# Altium PCB sonar_DAQ_single.PcbDoc
Units mil, origin at the board's own origin, x right, y up, seen from the top; angles counter-clockwise.
Board outline 3250 x 1000 mil, 2 copper layers (Top Layer, Bottom Layer); 36 components, 25 nets, 101 pads, 18 vias.
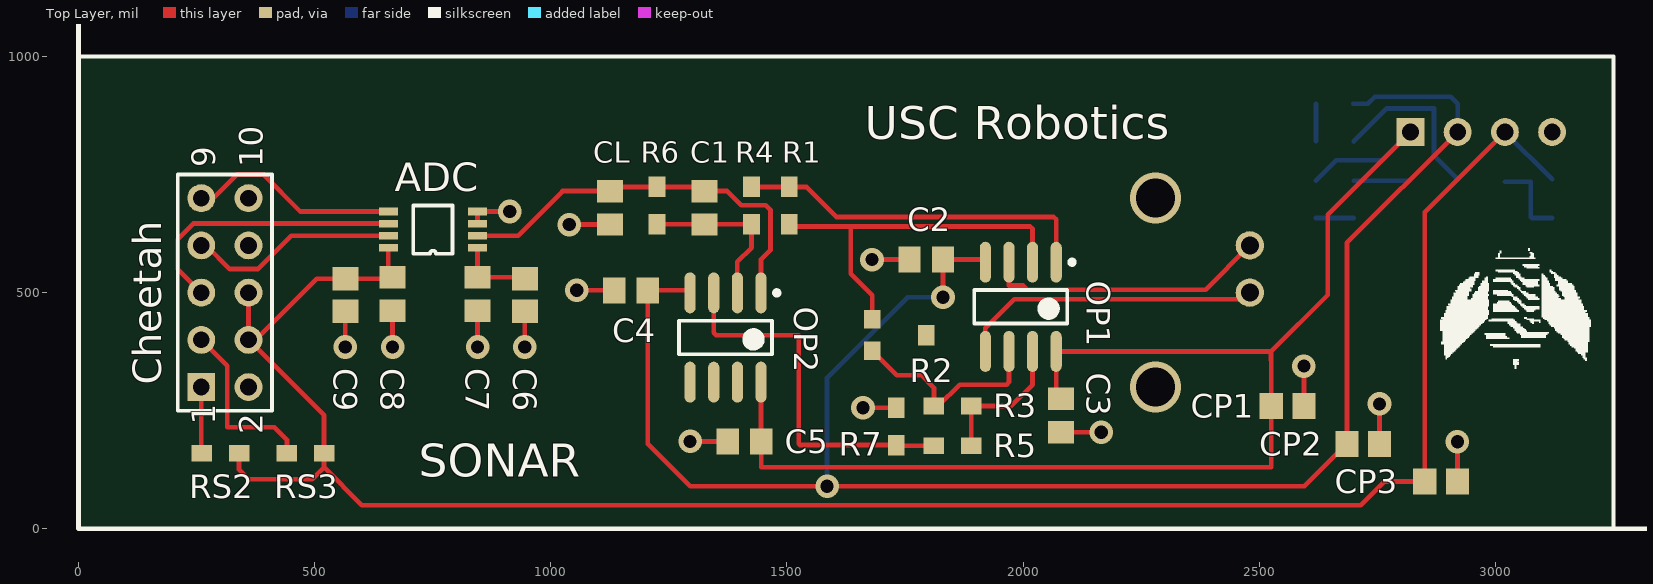
[diagram p0: Top Layer view]
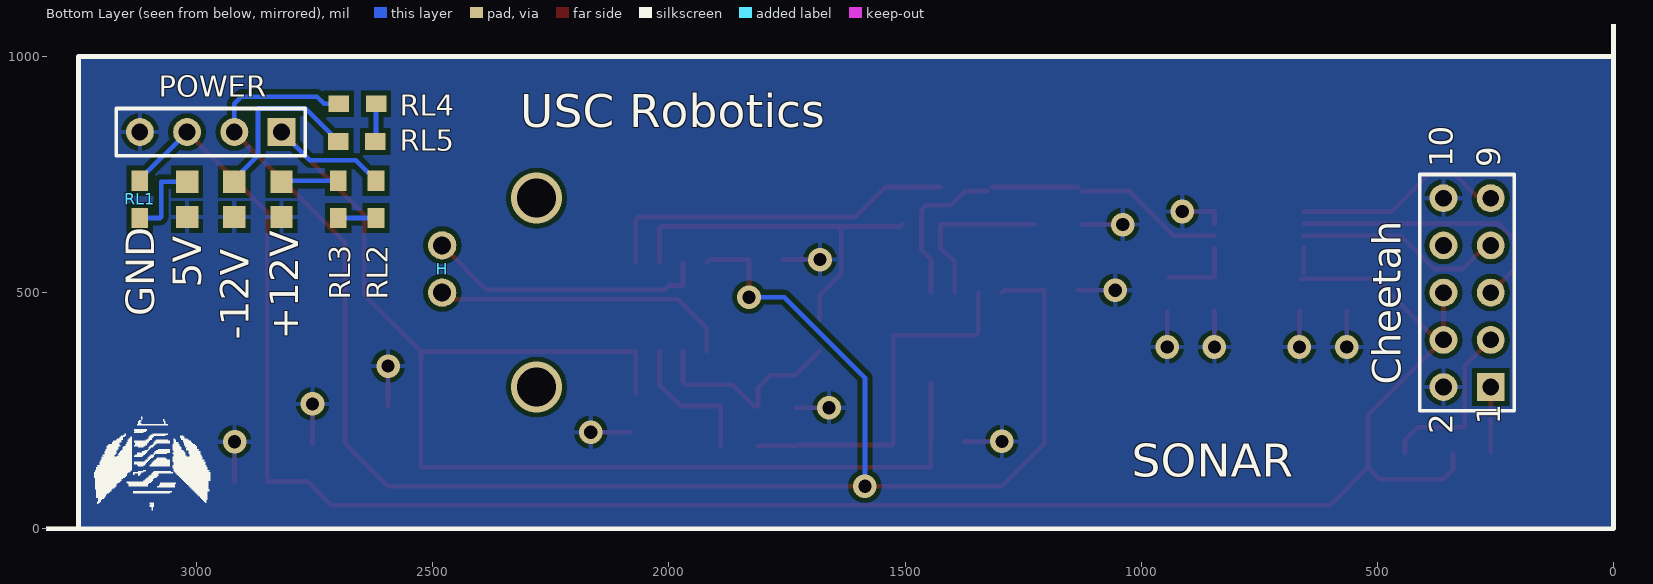
[diagram p1: Bottom Layer view, seen from below]

## Layer stack, top to bottom
Top Layer: signal copper 1.4
Dielectric: dielectric 12.6, FR-4, Dk 4.8
Bottom Layer: signal copper 1.4

## Board outline
0,0 0,1000 3250,1000 3250,0

## Design rules (kind name [scope] priority, off if disabled: settings)
Clearance [All] p1: gap=10
DiffPairsRouting [All] p1: maxlimit=10 minlimit=10 mostfreqgap=10 maxuncoupledlength=500
PolygonConnect [All] p1: connectstyle=Relief reliefconductorwidth=10 reliefentries=4 polygonreliefangle="90 Angle"
RoomDefinition sonar_DAQ_single [InComponentClass('sonar_DAQ_single')] p1: confinementstyle=ConfineIn formatcopy=TRUE lockcomponents=FALSE outline 0,0 6775,0 6775,8500 0,8500
RoutingVias [All] p1: holewidth=28 width=50 viastyle="Through Hole" minholewidth=28 minwidth=50 maxholewidth=28 maxwidth=50
SilkscreenOverComponentPads [All] p1: minsilkscreentomaskgap=10
SolderMaskExpansion [All] p1: expansion=4
TestPointUsage [All] p1: valid=0 allowmultiple=FALSE
Testpoint [All] p1: side=15 testpointundercomponent=TRUE minsize=40 maxsize=100 preferedsize=60 minholesize=0 maxholesize=40 preferedholesize=32 testpointgrid=1 style=1023 order=0123456789
Width [All] p1: maxlimit=10 minlimit=10 preferedwidth=10
22 further rules are at their usual default settings.

## Classes and differential pairs
differential pair H: +H_P -H_N

## Components (designator, comment, footprint, x,y, rotation, side; value= is the part's Value field where it differs from the comment)
5V "LED3" 0805_led 3020,734.8 r270 bottom
+12V "LED3" 0805_led 2820,734.8 r270 bottom
-12V "LED3" 0805_led 2920,660 r90 bottom
ADC "ADC" ADC 845,595 r180 top
C1 "Cap" 0805_ceramic_cap 1325,679.51 r270 top
C2 "Cap" 0805_ceramic_cap 1795,570 r0 top
C3 "Cap" 0805_ceramic_cap 2080,240 r90 top
C4 "Cap" 0805_ceramic_cap 1170,505 r0 top
C5 "Cap" 0805_ceramic_cap 1410,185 r0 top
C6 "2.2u" 0805_tantalum_cap 945,495 r270 top
C7 ".1u" 0805_ceramic_cap 845,496.97 r270 top
C8 ".1u" 0805_ceramic_cap 665,496.97 r270 top
C9 "10u" 0805_tantalum_cap 565,495 r270 top
Cheetah "Header 5X2" HDR2X5 260,300 r90 bottom
CL "Cap" 0805_ceramic_cap 1125,679.51 r270 top
CP1 "10u" 0805_tantalum_cap 2560,260 r0 top
CP2 "10u" 0805_tantalum_cap 2720,180 r0 top
CP3 "10u" 0805_tantalum_cap 2885,100 r0 top
H "BNC" BNC 2480,500 r90 bottom
OP1 "LT1113 Dual Opamp" lt1113_opamp 1995,470 r270 top
OP2 "LT1113 Dual Opamp" lt1113_opamp 1370,405 r270 top
POWER "Header 4" HDR1X4 2820,840 r0 bottom
R1 "Res1" 0805_res 1505,645 r90 top
R2 "RPot" trimmer_pot 1795,410 r270 top
R3 "Res1" 0805_res 1811.26,260 r0 top
R4 "Res1" 0805_res 1425,645 r90 top
R5 "Res1" 0805_res 1811.26,176.06 r0 top
R6 "Res1" 0805_res 1225,723.74 r270 top
R7 "Res1" 0805_res 1731.26,256.06 r270 top
RL1 "Res3" 0805_res 3120,658.03 r90 bottom
RL2 "Res3" 0805_res 2620,658.03 r90 bottom
RL3 "Res3" 0805_res 2700,736.77 r270 bottom
RL4 "Res3" 0805_res 2620,900 r0 bottom
RL5 "Res3" 0805_res 2700,820 r180 bottom
RS2 "Res1" 0805_res 340,160 r180 top
RS3 "Res1" 0805_res 520,160 r180 top

## Footprints (in the part's own frame and the unit in brackets; to place one, negate y for a bottom-side part, rotate by r counter-clockwise, add the part's x,y. Pads: shape width x height; smd on the part's side, far side on the other; paste and mask are expansions set on the pad)
0805_ceramic_cap [mm] "Murata"
  rect 1.2x1.4 smd: 1(-0.9,0) 2(0.9,0)
  body extent -1.05,-0.67 1.05,0.67, height 1.26
0805_led [mm]
  rect 1.2x1.2 smd: 1(0,0) 2(1.9,0)
0805_res [mm]
  rect 1.1x0.9 smd: 1(0,0) 2(2,0)
0805_tantalum_cap [mm] "F92 Nichicon"
  rect 1.25x1.4 smd: 1(-0.875,0) 2(0.875,0)
  body extent -1.1,-0.67 1.1,0.67, height 1.2
ADC [mm]
  rect 1.02x0.41 smd: 1(0,0) 2(0,-0.65) 3(0,-1.3) 4(0,-1.95) 5(4.8,-1.95) 6(4.8,-1.3) 7(4.8,-0.65) 8(4.8,0)
  silkscreen extent 1.34,-2.28 3.46,0.33
BNC [mil]
  round 60 hole 38.19: 1(0,0) 2(100,0)
HDR1X4 [mm] "Connector; Header; 4 Position"
  rect 1.5x1.5 hole 0.9: 1(0,0)
  round 1.5 hole 0.9: 2(2.54,0) 3(5.08,0) 4(7.62,0)
  silkscreen extent -1.27,-1.27 8.89,1.27
HDR2X5 [mm] "Connector; Header; 5x2 Position"
  rect 1.5x1.5 hole 0.9: 1(0,0)
  round 1.5 hole 0.9: 2(0,2.54) 3(2.54,0) 4(2.54,2.54) 5(5.08,0) 6(5.08,2.54) 7(7.62,0) 8(7.62,2.54) 9(10.16,0) 10(10.16,2.54)
  silkscreen extent -1.27,-1.27 11.43,3.81
lt1113_opamp [mm] "SOIC, 8-Leads, Body 5.0x4.0mm (max), Pitch 1.27mm, IPC Medium Density"
  oval 2.2x0.6 smd: 1(-2.4,1.905) 2(-2.4,0.635) 3(-2.4,-0.635) 4(-2.4,-1.905) 5(2.4,-1.905) 6(2.4,-0.635) 7(2.4,0.635) 8(2.4,1.905)
  silkscreen extent -2.52,-2.5 0.9,2.88, body extent -1.99,-2.52 1.99,2.52, height 1.75
trimmer_pot [mm]
  rect 1x0.9 smd: 1(-0.85,-2.9) 2(0.85,-2.9)
  rect 1.1x0.9 smd: 3(0,0)

## Part data
5V +12V -12V: "Typical BLUE SiC LED"
ADC: "ADS7835"
C1 C2 C3 C4 C5 CL: "Capacitor"
C6 C7 C8 C9 CP1 CP2 CP3: library part Cap, "Capacitor"
Cheetah: "Header, 5-Pin, Dual row"
H: "BNC Elbow Connector"
OP1 OP2: library part "LT1113 OPAMP"
POWER: "Header, 4-Pin"
R1 R3 R4 R5 R6 R7 RL1 RL2 RL3 RL4 RL5 RS2 RS3: "Resistor"
R2: "Potentiometer"

## Via types
v1: diameter 50, hole 28, Top Layer to Bottom Layer, 16 vias
v2: diameter 107.87, hole 82.28, Top Layer to Bottom Layer, 2 vias

## Nets (pads, with @x,y where several pads share a name; then routed paths per layer and width w, separated by ;. In a path a pad name is that pad's centre, name@x,y a point inside that pad or via, vN(x,y) a via of type N, cw(c..) or ccw(c..) an arc to the next point about the centre after c; other vN are vias at no path point)
5V: ADC.8 C8.1 C9.1 Cheetah.4 Cheetah.6 CP3.1 POWER.3 RL1.2 RS2.1 RS3.1 | length 4415.2
  Top Layer w10: RS2.1 340,125 360,105 495,105 520,130 ; Cheetah.6 Cheetah.4 ; C8.1@656.02,541.38 ADC.8 ; C8.1@662.05,529.45 C9.1 504.45,529.45 375,400 Cheetah.4 ; POWER.3 2850.55,670.55 CP3.1 2765,100 2715,50 600,50 520,130 ; Cheetah.4 520,240 RS3.1 520,130
  Bottom Layer w10: POWER.3 RL1.2@3120,740
+12V: C3.2 C5.2 CP1.1 OP1.8 OP2.8 POWER.1 RL2.2 | length 2897
  Top Layer w10: C5.2@1445,185.43 OP2.8 ; C5.2@1445.55,184.88 1445.55,130.55 2525.55,130.55 CP1.1 2525.55,375.55 2645,495 2645,665 POWER.1 ; C3.2@2070,285.43 OP1.8 2524.49,375.51 2524.49,356.61
  Bottom Layer w10: RL2.2 2663.23,780 2760,780 POWER.1
-12V: C2.2 C4.2 CP2.1 OP1.4 OP2.4 POWER.2 RL4.2 | length 3740
  Top Layer w10: OP2.4 1289.49,505 C4.2 1205.43,179.57 1295,90 v1(1585,90) 2595.55,90 CP2.1 2685.55,605.55 POWER.2 ; v1(1830.43,490.43) C2.2 1914.49,570 OP1.4
  Bottom Layer w10: v1(1585,90) 1585,320 1755.43,490.43 v1(1830.43,490.43) ; RL4.2 2730,900 2745,915 2905,915 2920,900 POWER.2
GND: 5V.2 +12V.2 -12V.1 ADC.3 ADC.4 C2.1 C3.1 C4.1 C5.1 C6.2 C7.2 C8.2 C9.2 Cheetah.2 Cheetah.10 CL.2 CP1.2 CP2.2 CP3.2 POWER.4 R7.1 | length 1131.6
  Top Layer w10: v1(565,385) C9.2 ; v1(665,385) C8.2 ; v1(845,385) C7.2 ; ADC.3 ADC.4 v1(913.23,671.77) ; v1(945,385) C6.2 ; v1(1039.08,644.08) CL.2 ; v1(1055,505) C4.1 ; v1(1295,185) C5.1 ; v1(1661.06,256.06) R7.1 ; v1(1680,570) C2.1 ; C3.1 v1(2165.43,204.57) ; CP1.2 v1(2594.45,344.45) ; CP2.2 v1(2754.45,264.45) ; CP3.2 v1(2919.45,184.45)
H_N: H.2 OP1.3 | length 602
  Top Layer w10: OP1.3 1970,515 2000.08,515 2008.89,506.18 2386.18,506.18 H.2
H_P: H.1 OP1.5 | length 640.6
  Top Layer w10: OP1.5 1920,425 1981.18,486.18 2466.18,486.18 H.1
MISO: ADC.6 Cheetah.5 | length 593.5
  Top Layer w10: Cheetah.5 210,550 210,612.97 243.21,646.18 ADC.6
MOSI: Cheetah.8
Net5V_1: 5V.1 RL1.1 | length 175.9
  Bottom Layer w10: 5V.1 3074.8,734.8 3075,735 3075,660 3076.97,658.03 RL1.1
Net+12V_1: +12V.1 RL3.1 | length 118
  Bottom Layer w10: RL3.1 +12V.1@2818.03,736.77
Net-12V_2: -12V.2 RL5.1 | length 369.7
  Bottom Layer w10: RL5.1 2770,890 2870,890 2870,790 -12V.2@2920,740
NetADC_1: ADC.1 C6.1 C7.1 | length 159.6
  Top Layer w10: ADC.1 C7.1 C6.1@942.05,532.4
NetADC_2: ADC.2 C1.1 CL.1 OP2.1 R6.1 | length 841.8
  Top Layer w10: ADC.2 930.59,620.59 1024.94,714.94 CL.1 ; CL.1@1133.8,723.74 R6.1 C1.1@1316.2,723.74 ; C1.1@1325.06,715 1373.16,715 1403.16,685 1455,685 1465,675 1465,590 1445,570 OP2.1
NetC1_2: C1.2 OP2.2 R4.1 R6.2 | length 357.4
  Top Layer w10: R6.2 C1.2@1324.08,645 ; C1.2@1325.92,645 R4.1 ; OP2.2 1395,565 1425,595 R4.1 ; R4.1@1424.08,644.08 R4.1
NetOP1_1: OP1.1 R1.2 R4.2 | length 769.3
  Top Layer w10: R4.2 R1.2 ; R1.2@1508.74,720 R1.2 ; OP1.1 2070,655 2065,660 1605,660 1541.26,723.74 R1.2
NetOP1_2: OP1.2 R1.1 R2.1 | length 805.2
  Top Layer w10: R1.1 1510,640 1635,640 ; R2.1 1680.83,494.17 1635,540 1635,640 ; OP1.2 2020,635 2015,640 1635,640
NetOP1_6: OP1.6 R2.2 R3.1 | length 446.4
  Top Layer w10: R2.2 1732.36,325 1785,325 1811.26,298.74 R3.1 1820.63,260 1865.63,305 1965,305 1970,310 OP1.6
NetOP1_7: OP1.7 R3.2 R5.2 | length 303.1
  Top Layer w10: R5.2 R3.2 1975,260 2020,305 OP1.7
NetOP2_3: OP2.3 R5.1 R7.2 | length 782.7
  Top Layer w10: OP2.3 1345,415 1350,410 1525,410 1525,180 1527.68,177.32 R7.2 ; R7.2@1732.52,176.06 R5.1
NetRL2_1: RL2.1 RL3.2 | length 80
  Bottom Layer w10: RL2.1 RL3.2
NetRL4_1: RL4.1 RL5.2 | length 78.7
  Bottom Layer w10: RL5.2@2620,821.26 RL4.1
SCLK: ADC.7 Cheetah.7 | length 446
  Top Layer w10: Cheetah.7 270,600 320,550 380,550 450.59,620.59 ADC.7
SS1: ADC.5 Cheetah.9 | length 449.1
  Top Layer w10: Cheetah.9 285,700 335,750 391.77,750 470,671.77 ADC.5
SS2: Cheetah.1 RS2.2 | length 138.7
  Top Layer w10: RS2.2@260,161.26 Cheetah.1
SS3: Cheetah.3 RS3.2 | length 373.7
  Top Layer w10: Cheetah.3 315,345 315,215 415,215 441.26,188.74 RS3.2
pads on no net: OP2.5 OP2.6 OP2.7 R2.3
copper on no net:
  other v2: 2280,300 2280,700

## Polygon pours and split planes (outlines as drawn)
GND on Bottom Layer "GND - Bottom Layer" (solid, pour order 1000): 1.9,-1.77 1.9,998.23 3251.9,998.23 3251.9,-1.77

## Silkscreen, mask and mechanical layers (free items; w line width, h text height)
Top Overlay:
  drawing of 28 lines, arcs and shapes, not listed
  text "USC Robotics" at 1665,825 h70
  text "9" at 290,765 h50 r90
  text "10" at 390,765 h50 r90
  text "Cheetah" at 175,305 h60 r90
  text "1" at 290,220 h50 r90
  text "2" at 390,200 h50 r90
  text "SONAR" at 720,110 h70
Bottom Overlay:
  drawing of 23 lines, arcs and shapes, not listed
  text "USC Robotics" at 2315,850 h70
  text "GND" at 3090,450 h60 r270
  text "SONAR" at 1020,110 h70

## Panel: embedded boards
"sonar_DAQ_single_BNC.PcbDoc" at 3925,3845, 2 rows x 1 columns, spacing 1125 x 3375, rotation 0
"sonar_DAQ.PcbDoc" at 0,6125, 2 rows x 1 columns, spacing 7300 x 3925, rotation 270
"..\Kill Switch\killswitch.PcbDoc" at 0,6335, 1 rows x 2 columns, spacing 2500 x 1665, rotation 0

## Text inside footprints (layer, text, board x,y; h text height)
Cheetah: Bottom Overlay "2" at 340,200 h50 r270; Bottom Overlay "1" at 240,220 h50 r270; Bottom Overlay "9" at 240,765 h50 r270; Bottom Overlay "10" at 340,765 h50 r270